# EAGLE board open_bioband_V1.1 (EAGLE 8.0.0)
REV: A
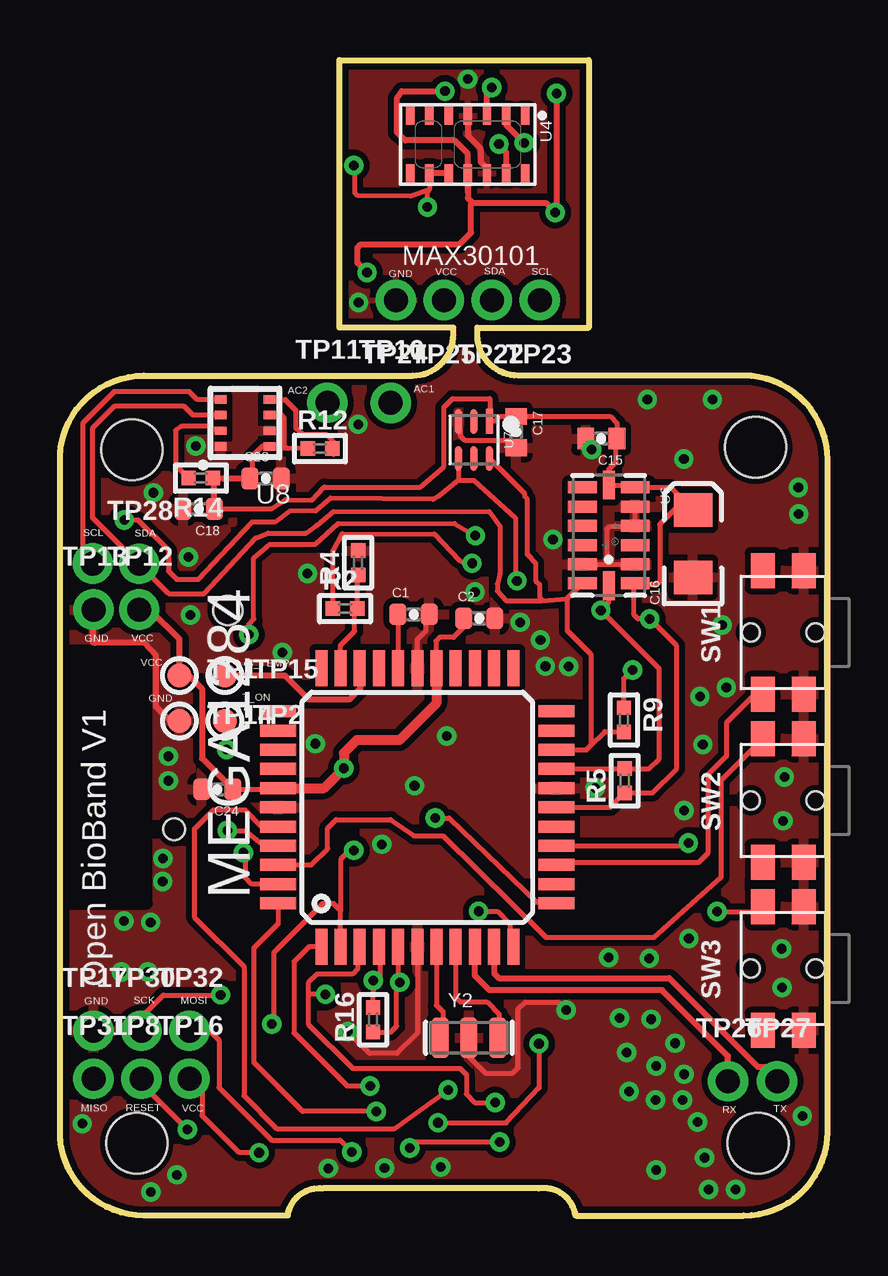
[diagram p0: board, top side]
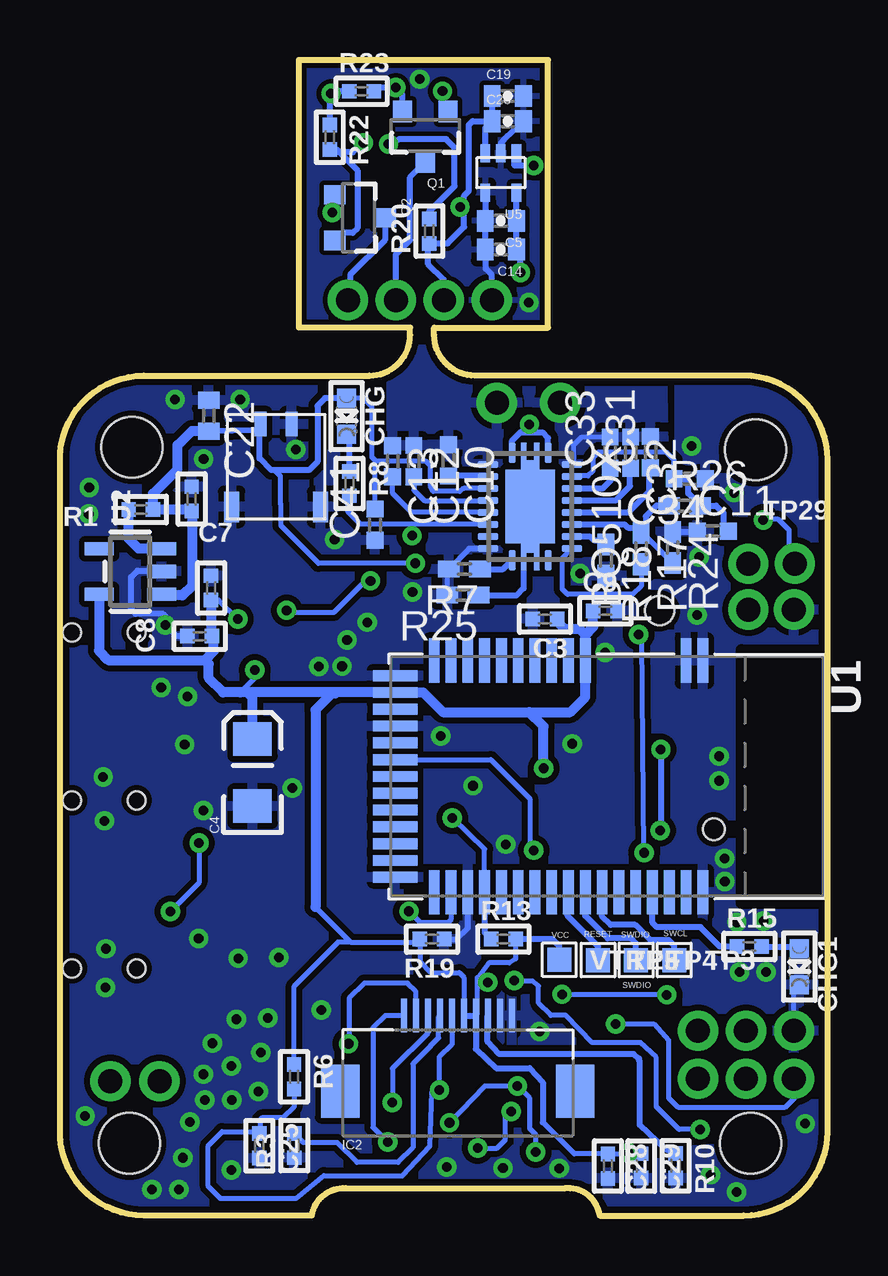
[diagram p1: board, bottom side, seen from below]

Size 32 x 48.15 mm. Coordinates in mm from the lower left corner, seen from the top.
Outline: 21.5,0 28.5,0 arc90 32,3.5 32,31.5 arc90 28.5,35 19.1,35 arc-90 17.4,36.7 17.4,37 22.05,37 22.05,48.15 11.65,48.15 11.65,37 16.4,37 16.4,36.7 arc-90 14.7,35 3.5,35 arc90 0,31.5 0,3.5 arc90 3.5,0 9.5,0 arc-90 10.96,1.13 19.96,1.13 arc-90 21.5,0
Copper layers (1*16): Top 0.035mm / dielectric 1.5mm / Bottom 0.035mm
Design rules "micron20 *": minimum track width 6mil, minimum drill 6mil, track to track 0.2mm, track to pad 0.2mm, pad to pad 0.2mm, via to via 0.2mm, smd to smd 0mil, copper to edge 8mil, drill to drill 8mil, minimum pad ring 10mil, minimum via ring 8mil, stop-mask expansion 4mil, vias tented up to drill 0mil, thermal gap 10mil
Net classes: 1 power: width 0.203 mm
Holes 2.54 mm at 3,31.91 29,32.01 29.1,3.01 3.2,3.01
Holes 1.2 mm at 7,25.21
tRestrict: area -0.2,13 to 3.6,23.5
bRestrict: area -0.2,13 to 3.6,23.6

## Footprints (pad centres in the part's own frame; a part is rotated, then mirrored left to right if it is on the bottom)
R-PQFP-N20 = smd 0.85 x 0.28: 1 -2.235,-0.75; 10 2.235,-0.75; 11 2.235,0.75; 20 -2.235,0.75 | smd 0.28 x 0.85: 2 -1.75,-1.75; 3 -1.25,-1.75; 4 -0.75,-1.75; 5 -0.25,-1.75; 6 0.25,-1.75; 7 0.75,-1.75; 8 1.25,-1.75; 9 1.75,-1.75; 12 1.75,1.75; 13 1.25,1.75; 14 0.75,1.75; 15 0.25,1.75; 16 -0.25,1.75; 17 -0.75,1.75; 18 -1.25,1.75; 19 -1.75,1.75 | smd 3.05 x 2.05: E@1 0,0 | smd 3.85 x 0.5: E@2 0,0 | smd 5.3 x 0.23: E@3 0,0.275; E@4 0,-0.275
0402-CAP = smd 0.7 x 0.9: 1 -0.65,0; 2 0.65,0
_0402 = smd 0.6 x 0.6: 1 -0.508,0; 2 0.508,0
EIA3216 = smd 1.4 x 1.6: A 1.4,0; C -1.4,0
C0402_LIBELIUM = smd 0.7 x 0.7: 1 -0.65,0; 2 0.65,0
C0402 = smd 0.7 x 0.9: 1 -0.65,0; 2 0.65,0
CHIPLED_0603 = smd 0.8 x 0.8: A 0,-0.75; C 0,0.75
FPC_10PIN_52892-1095 = smd 0.25 x 1.4: P$1 -2.25,0; P$2 -1.75,0; P$3 -1.25,0; P$4 -0.75,0; P$5 -0.25,0; P$6 0.25,0; P$7 0.75,0; P$8 1.25,0; P$9 1.75,0; P$10 2.25,0 | smd 1.6 x 2.2: SUPPORT1 -4.9,-3.15; SUPPORT2 4.9,-3.15
TQFP44 = smd 1.5 x 0.5: 1 -5.8,4; 2 -5.8,3.2; 3 -5.8,2.4; 4 -5.8,1.6; 5 -5.8,0.8; 6 -5.8,0; 7 -5.8,-0.8; 8 -5.8,-1.6; 9 -5.8,-2.4; 10 -5.8,-3.2; 11 -5.8,-4; 23 5.8,-4; 24 5.8,-3.2; 25 5.8,-2.4; 26 5.8,-1.6; 27 5.8,-0.8; 28 5.8,0; 29 5.8,0.8; 30 5.8,1.6; 31 5.8,2.4; 32 5.8,3.2; 33 5.8,4 | smd 0.5 x 1.5: 12 -4,-5.8; 13 -3.2,-5.8; 14 -2.4,-5.8; 15 -1.6,-5.8; 16 -0.8,-5.8; 17 0,-5.8; 18 0.8,-5.8; 19 1.6,-5.8; 20 2.4,-5.8; 21 3.2,-5.8; 22 4,-5.8; 34 4,5.8; 35 3.2,5.8; 36 2.4,5.8; 37 1.6,5.8; 38 0.8,5.8; 39 0,5.8; 40 -0.8,5.8; 41 -1.6,5.8; 42 -2.4,5.8; 43 -3.2,5.8; 44 -4,5.8
SOT23-3 = smd 0.8 x 0.9: 1 -0.95,-1; 2 0.95,-1; 3 0,1.1
R0402_LIBELIUM = smd 0.9 x 0.7: 1 -0.65,0; 2 0.65,0
TACT_SMD2 = smd 1.45 x 1: 1 -2.575,-0.5; 2 -2.575,-2.2; 3 2.575,-0.5; 4 2.575,-2.2 | hole 0.75: 0,0; 0,-2.7
TESTPOINT_ROUND_1MM = smd 1 x 1: P$1 0,0
TESTPOINT_PAD_1MM = smd 1 x 1: P$1 0,0
1X01_ROUND = drill 1 pad 1.676: 1 0,0
BLE_MODULE_RAYTAC_MDBT40 = smd 1.85 x 0.45: 1 -4.825,4; 2 -4.825,3.3; 3 -4.825,-0.9; 4 -4.825,-1.6; 5 -4.825,-2.3; 6 -4.825,-3; 7 -4.825,-3.7; 8 -4.825,-4.4; 9 -4.825,-5.1; 10 -4.825,-5.8; 11 -4.825,-6.5; 12 -4.825,-7.2; 26 4.825,-7.2; 27 4.825,-6.5; 28 4.825,-5.8; 29 4.825,-5.1; 30 4.825,-4.4; 31 4.825,-3.7; 32 4.825,-3; 33 4.825,-2.3; 34 4.825,-1.6; 35 4.825,-0.9; 36 4.825,-0.2; 37 4.825,0.5; 38 4.825,1.2; 39 4.825,1.9; 40 4.825,2.6; 41 4.825,3.3; 42 4.825,4 | smd 0.45 x 1.85: 13 -4.2,-8.825; 14 -3.5,-8.825; 15 -2.8,-8.825; 16 -2.1,-8.825; 17 -1.4,-8.825; 18 -0.7,-8.825; 19 0,-8.825; 20 0.7,-8.825; 21 1.4,-8.825; 22 2.1,-8.825; 23 2.8,-8.825; 24 3.5,-8.825; 25 4.2,-8.825 | hole 0.9: 2.2,4.45
SOT23-5 = smd 0.55 x 1.2: 1 -0.95,-1.3; 2 0,-1.3; 3 0.95,-1.3; 4 0.95,1.3; 5 -0.95,1.3
OLGA-14 = smd 0.75 x 0.35: 1 -1.2,2.4; 2 -1.2,1.6; 3 -1.2,0.8; 4 -1.2,0; 5 -1.2,-0.8; 6 -1.2,-1.6; 7 -1.2,-2.4; 8 1.2,-2.4; 9 1.2,-1.6; 10 1.2,-0.8; 11 1.2,0; 12 1.2,0.8; 13 1.2,1.6; 14 1.2,2.4
SC70 = smd 0.4 x 0.75: 1 -0.65,-0.825; 2 0,-0.825; 3 0.65,-0.825; 4 0.65,0.825; 5 -0.65,0.825
LGA14 = smd 0.5 x 1.2: 1 2,1.1; 2 1.2,1.1; 3 0.4,1.1; 4 -0.4,1.1; 5 -1.2,1.1; 6 -2,1.1; 8 -2,-1.1; 9 -1.2,-1.1; 10 -0.4,-1.1; 11 0.4,-1.1; 12 1.2,-1.1; 13 2,-1.1 | smd 1.2 x 0.5: 7 -2.1,0; 14 2.1,0
FN-6 = smd 1.05 x 0.3: 1 -0.775,0.65; 2 -0.775,0; 3 -0.775,-0.65; 4 0.775,-0.65; 5 0.775,0; 6 0.775,0.65
BME280_LGA = smd 0.5 x 0.35: P$1 1.025,0.975; P$2 1.025,0.325; P$3 1.025,-0.325; P$4 1.025,-0.975; P$5 -1.025,-0.975; P$6 -1.025,-0.325; P$7 -1.025,0.325; P$8 -1.025,0.975
DF57H-2P = smd 0.508 x 1.016: P$1 1.4,3.95; P$2 2.7,3.95 | smd 0.635 x 1.27: P$3 0.2,0.5; P$4 3.9,0.5
RESONATOR-SMD = smd 0.7 x 1.7: 1 -1.2,0; 2 0,0; 3 1.2,0

## Placement (x,y rotation side)
BQ510X  BQ24120  [R-PQFP-N20]  12.4,29.55 270 bottom
C1  0.1uF  [0402-CAP]  14.74,25.05 0 top
C2  0.1uF  [0402-CAP]  17.48,24.89 0 top
C3  1uF  [_0402]  11.78,24.86 180 bottom
C4  10uF  [EIA3216]  23.97,18.46 90 bottom
C5  0.1uF  [0402-CAP]  13.62,41.45 180 bottom
C6  10µF  [_0402]  26.51,29.86 90 bottom
C7  1uF  [_0402]  25.7,26.15 90 bottom
C8  10µF  [_0402]  26.18,24.14 180 bottom
C9  1uF  [_0402]  9.26,25.2 0 bottom
C10  0.01uF  [C0402_LIBELIUM]  15.8,31.47 270 bottom
C11  4.7uF  [C0402_LIBELIUM]  4.78,28.52 0 bottom
C12  0.47uF  [C0402_LIBELIUM]  17.25,31.44 270 bottom
C13  0.022uF  [C0402_LIBELIUM]  18.13,31.43 270 bottom
C14  4.7uF  [0402-CAP]  13.62,40.25 180 bottom
C15  0.1uF  [0402-CAP]  22.57,32.38 180 top
C16  10uF  [EIA3216]  26.39,27.99 90 top
C17  0.1uF  [0402-CAP]  19.02,32.65 270 top
C18  0.1uF  [0402-CAP]  5.78,29.45 180 top
C19  10uF  [0402-CAP]  13.33,46.65 0 bottom
C20  0.1uF  [0402-CAP]  13.33,45.6 0 bottom
C22  4.7uF  [C0402]  25.8,33.33 270 bottom
C23  0.1uF  [0402-CAP]  8.57,30.71 0 top
C24  0.1uF  [0402-CAP]  6.56,17.76 180 top
C25  0.1µF  [_0402]  23.69,2.91 270 bottom
C28  1µF  [_0402]  9.15,2.06 270 bottom
C29  1µF  [_0402]  7.76,2.07 270 bottom
C31  0.022uF  [C0402_LIBELIUM]  7.38,31.81 90 bottom
C32  0.47uF  [C0402_LIBELIUM]  8.21,31.79 270 bottom
C33  0.01uF  [C0402_LIBELIUM]  9.06,31.79 90 bottom
C34  0.022uF  [C0402_LIBELIUM]  5.75,30.7 180 bottom
C41  4.7uF  [C0402_LIBELIUM]  18.86,28.79 90 bottom
CHG  ORANGE  [CHIPLED_0603]  20.05,33.31 180 bottom
CHG1  BLUE  [CHIPLED_0603]  1.18,10.37 180 bottom
IC2  LS013B4DN04  [FPC_10PIN_52892-1095]  15.42,8.34 0 bottom
MEGA1284  [TQFP44]  14.9,17.01 90 top
Q1  200mA/50V  [SOT23-3]  16.77,45 180 bottom
Q2  200mA/50V  [SOT23-3]  19.55,41.58 270 bottom
R1  100k  [_0402]  28.63,29.42 180 bottom
R2  100k  [_0402]  11.89,25.29 0 top
R3  10k  [_0402]  22.23,2.92 90 bottom
R4  100K  [_0402]  12.43,27.2 90 top
R5  4.7K  [_0402]  23.54,18.12 90 top
R6  10k  [_0402]  22.24,5.79 270 bottom
R7  2.43K  [R0402_LIBELIUM]  15.14,26.94 180 bottom
R8  1K  [_0402]  19.93,30.5 270 bottom
R9  4.7K  [_0402]  23.51,20.65 270 top
R10  10k  [_0402]  6.33,2.07 270 bottom
R12  4.7K  [_0402]  10.84,31.96 0 top
R13  100K  [_0402]  13.51,11.52 0 bottom
R14  4.7K  [_0402]  5.87,30.73 180 top
R15  1k  [_0402]  3.26,11.21 0 bottom
R16  4.7K  [_0402]  13.05,8.16 90 top
R17  3.83K  [R0402_LIBELIUM]  7.77,27.79 270 bottom
R18  10k  [R0402_LIBELIUM]  9.24,27.31 270 bottom
R19  100K  [_0402]  16.49,11.52 180 bottom
R20  4.7K  [_0402]  16.6,41.02 90 bottom
R22  4.7K  [_0402]  20.75,44.93 270 bottom
R23  4.7K  [_0402]  19.43,46.85 0 bottom
R24  140  [R0402_LIBELIUM]  6.46,27.84 270 bottom
R25  0  [R0402_LIBELIUM]  15.2,25.86 180 bottom
R26  100k  [R0402_LIBELIUM]  5.96,29.58 0 bottom
SW1  [TACT_SMD2]  28.8,24.3 90 top
SW2  [TACT_SMD2]  28.8,17.3 90 top
SW3  [TACT_SMD2]  28.8,10.3 90 top
TP1  [TESTPOINT_ROUND_1MM]  4.98,22.51 0 top
TP2  [TESTPOINT_ROUND_1MM]  6.88,20.61 0 top
TP3  SWCLK  [TESTPOINT_PAD_1MM]  6.39,10.65 0 bottom
TP4  SWDIO  [TESTPOINT_PAD_1MM]  7.98,10.65 0 bottom
TP5  FCTRST  [TESTPOINT_PAD_1MM]  9.57,10.65 0 bottom
TP8  [1X01_ROUND]  3.4,5.7 0 top
TP10  [1X01_ROUND]  13.79,33.86 0 top
TP11  [1X01_ROUND]  11.15,33.87 0 top
TP12  [1X01_ROUND]  3.3,25.25 0 top
TP13  [1X01_ROUND]  1.4,25.25 0 top
TP14  [TESTPOINT_ROUND_1MM]  4.98,20.61 0 top
TP15  [TESTPOINT_ROUND_1MM]  6.88,22.51 0 top
TP16  [1X01_ROUND]  5.4,5.7 0 top
TP17  [1X01_ROUND]  1.4,7.7 0 top
TP22  [1X01_ROUND]  18,38.15 180 top
TP23  [1X01_ROUND]  20,38.15 180 top
TP24  [1X01_ROUND]  14,38.15 180 top
TP25  [1X01_ROUND]  16,38.15 180 top
TP26  [1X01_ROUND]  27.85,5.6 0 top
TP27  [1X01_ROUND]  29.9,5.6 0 top
TP28  [1X01_ROUND]  3.3,27.16 0 top
TP29  [1X01_ROUND]  1.36,27.17 0 bottom
TP30  [1X01_ROUND]  3.4,7.7 0 top
TP31  [1X01_ROUND]  1.4,5.7 0 top
TP32  [1X01_ROUND]  5.4,7.7 0 top
U1  [BLE_MODULE_RAYTAC_MDBT40]  9.2,18.3 270 bottom
U2  AP2112-3.3  [SOT23-5]  29.07,26.84 90 bottom
U4  MAX30101  [OLGA-14]  17,44.63 270 top
U5  1.8V/100mA  [SC70]  13.62,43.45 180 bottom
U6  ADXL345ORIG  [LGA14]  22.88,28.34 270 top
U7  TSL2561FN  [FN-6]  17.26,32.32 270 top
U8  BME280  [BME280_LGA]  7.72,33.03 180 top
U$3  DF57H  [DF57H-2P]  25.04,29.03 0 bottom
VTREF  FCTRST  [TESTPOINT_PAD_1MM]  11.18,10.66 0 bottom
Y2  RESONATORSMD  [RESONATOR-SMD]  17.05,7.41 0 top

## Library data of the parts
BQ510X = texas_2
C1 C2 C4 C18 C23 C24 Y2 = microduino
C3 C6 C7 C9 C25 C28 C29 CHG CHG1 IC2 R1-R6 R8-R10 R12-R16 R19 R20 R22 R23 TP1-TP5 TP14 TP15 U1 U2 VTREF = microbuilder
C5 C14 C17 C19 C20 = SparkFun-Capacitors
C8 = microbuilder; COMPANY: ADAFRUIT INDUSTRIES; DRAWN: KTOWN; REV: A
C10-C13 C31-C34 C41 R7 R17 R18 R24-R26 = libelium
C15 C16 = SparkFun
C22 = rcl
MEGA1284 = atmel; OC_FARNELL: 1455123; OC_NEWARK: 58M3748
Q1 Q2 = SparkFun-DiscreteSemi; PROD_ID: TRANS-00830
SW1-SW3 = zak
TP8 TP10-TP13 TP16 TP17 TP22-TP32 = microbuilder; BOM: EXCLUDE
U4 = SparkFun-Sensors; PROD_ID: IC-13510
U5 = SparkFun-PowerIC; PROD_ID: VREG-08428
U6 = Testing
U7 = mike-temp
U8 = BME280ComponentLibrary; PROD_ID: IC-13090
U$3 = onomo

## Nets
1.8V: C5.1 C14.1 Q1.1 Q2.1 R22.1 R23.1 U4.11 U5.5
5: MEGA1284.41 TP2.P$1
14: MEGA1284.26
15: MEGA1284.25
16(TDI): MEGA1284.24
17(TDO): MEGA1284.23
18(TMS): MEGA1284.22
19(TCK): MEGA1284.21
23: MEGA1284.16
!CS: R14.2 U8.P$2
!INT: R20.2 U4.13
!RESET: MEGA1284.4 R16.2 TP8.1
+3V3: C2.1 C3.1 C4.A C7.1 C8.1 C9.1 C15.1 C16.A C17.1 C18.1 C23.1 C24.1 C28.1 C29.1 IC2.P$6 IC2.P$7 MEGA1284.5 MEGA1284.17 MEGA1284.27 MEGA1284.38 R5.1 R6.1 R9.1 R12.1 R13.2 R14.1 R16.1 R19.2 TP1.P$1 TP12.1 TP16.1 U1.3 U1.14 U2.5 U6.1 U6.6 U6.7 U7.1 U8.P$6 U8.P$8 VTREF.P$1
+3V31: C19.1 C20.1 R20.1 TP25.1 U4.9 U4.10 U5.1 U5.3
A0: MEGA1284.30
A2: MEGA1284.32 R2.2 R4.1
A3: MEGA1284.33
A4: MEGA1284.34
A5: MEGA1284.35
A6: MEGA1284.36
A7: MEGA1284.37
AC1: BQ510X.2 C10.1 C12.1 C13.1 TP10.1
AC2: BQ510X.19 C31.2 C32.1 C33.2 TP11.1
AREF: C1.1 MEGA1284.29
BOOT3: BQ510X.3 C10.2
CHG: BQ510X.7 MEGA1284.43 R8.2
CLMP2: BQ510X.16 C32.2
CONNECTED_LED: R15.1 U1.39
DCC: U1.15
DEC2: U1.41
DFU_3V: U1.24
DISP: C25.1 IC2.P$5 MEGA1284.40 R6.2
EN: R1.2 U2.3
EXTCOMIN: IC2.P$4 R3.2
EXTMODE: IC2.P$8 R10.1
FCTRYRST_3V: TP5.P$1 U1.34
FOD: BQ510X.14 R17.1 R24.2 R26.1
GND: BQ510X.1 BQ510X.9 BQ510X.20 C1.2 C2.2 C3.2 C4.C C6.2 C7.2 C8.2 C9.2 C11.1 C15.2 C16.C C17.2 C18.2 C22.1 C23.2 C24.2 C25.2 C28.2 C29.2 C34.1 C41.1 CHG1.C IC2.P$9 IC2.P$10 MEGA1284.6 MEGA1284.18 MEGA1284.28 MEGA1284.39 R3.1 R4.2 R7.2 R10.2 R18.2 R19.1 R24.1 R25.2 SW1.2 SW1.4 SW2.2 SW2.4 SW3.2 SW3.4 TP13.1 TP14.P$1 TP17.1 U1.1 U1.2 U1.13 U1.16 U1.25 U1.28 U1.42 U2.2 U6.2 U6.4 U6.5 U6.12 U7.3 U8.P$1 U8.P$7 U$3.P$2 U$3.P$3 U$3.P$4 Y2.2
GND1: C5.2 C14.2 C19.2 C20.2 TP24.1 U4.4 U4.12 U5.2 U5.4
LV_SCL: Q2.2 R22.2 U4.2
LV_SDA: Q1.2 R23.2 U4.3
MISO: MEGA1284.2 TP31.1 U1.18
MOSI: IC2.P$2 MEGA1284.1 TP32.1
N$1: CHG.C R8.1
N$2: MEGA1284.7 Y2.1
N$6: CHG1.A R15.2
N$9: MEGA1284.8 Y2.3
N$14: BQ510X.6 C13.2
N$15: BQ510X.5 C12.2
N$19: BQ510X.10 R7.1
N$21: BQ510X.17 C33.1
N$23: BQ510X.18 C11.2 C34.2 R26.2
N$24: BQ510X.15 C31.1
N$25: BQ510X.8
N$26: BQ510X.12 R17.2
N$27: BQ510X.11
N$28: BQ510X.E@1 BQ510X.E@2 BQ510X.E@3 BQ510X.E@4 R25.1
NAV_DOWN: MEGA1284.15 SW3.3
NAV_SEL: MEGA1284.42 SW2.3
NAV_UP: MEGA1284.14 SW1.1
OUT: BQ510X.4 C6.1 C22.2 C41.2 CHG.A R1.1 R2.1 U2.1 U$3.P$1
P0.5: BQ510X.13 R18.1
RTS_O: U1.26
RX: MEGA1284.9 TP26.1
RX1: MEGA1284.11 U1.27
S_TEMP: MEGA1284.31 TP15.P$1
SCL: MEGA1284.19 R5.2 TP29.1 U6.14 U7.4 U8.P$4
SCL1: Q2.3 TP23.1
SCLK: IC2.P$1 MEGA1284.44
SCS: IC2.P$3 MEGA1284.3 TP30.1
SDA: MEGA1284.20 R9.2 TP28.1 U6.13 U7.6 U8.P$3
SDA1: Q1.3 TP22.1
SDO/ADR: R12.2 U8.P$5
SWCLK: TP3.P$1 U1.36
SWDIO/RST_3V: TP4.P$1 U1.35
TX: MEGA1284.10 TP27.1
TX1: MEGA1284.12 R13.1 U1.29

## Tracks (layer width: path | path; a pad name or v marks a point on that pad's centre or on a via)
1.8V  (via drill 0.4)
  Top 0.254: v12.8,39.3 12.4,39.7 12.4,40.33 12.54,40.47 16.65,40.47 17.14,40.96 17.14,42.14 17.2,42.2 | 17,42.65 U4.11 | U4.11 17,42.4 17.2,42.2 | 17.2,42.2 20.25,42.2 v20.65,41.8 20.7,41.85 v20.7,46.75 | U4.11 17,44.25 16.45,44.8 14.4,44.8 14.05,45.15 14.05,46.55 14.25,46.85 v16.05,46.85
  Bottom 0.254: U5.5 C5.1 C14.1 12.8,40.08 v12.8,39.3 | v20.65,41.8 20.65,42.43 Q2.1 | v16.05,46.85 16.05,46.23 Q1.1 | R23.1 20.6,46.85 v20.7,46.75 20.75,46.7 R22.1
5  (via drill 0.4)
  Top 0.2: v6.98,16.04 7.74,16.04 8.43,15.47 9.04,15.47 MEGA1284.41
  Top 0.254: TP2.P$1 6.88,19.49 v6.95,19.42
  Bottom 0.254: v6.95,19.42 6.95,16.07 v6.98,16.04
!CS
  Top 0.2: U8.P$2 6.67,32.72 6.48,32.72 6.25,32.88 5.06,32.88 4.82,32.72 4.82,31.27 R14.2
!INT  (via drill 0.4)
  Top 0.254: v18.3,44.65 18.4,44.55 18.6,44.3 U4.13
  Bottom 0.254: R20.2 16.6,41.85 15.55,42.9 15.55,44.5 15.9,44.85 17.85,44.85 v18.3,44.65
!RESET  (via drill 0.4)
  Top 0.2: MEGA1284.4 13.36,11.14 13.36,9.83 v13.06,9.8 R16.2 12.94,8.67 | TP8.1 3.4,5.5 v5.31,3.59
  Bottom 0.2: v5.31,3.59 6.19,3.59 7.14,4.54 7.14,6.59 7.8,7.21 9.81,7.21 10.9,8.34 11.54,8.34 12.05,8.85 12.05,9.57 12.3,9.77 12.62,9.77 13.05,9.77 v13.06,9.8
+3V3  (via drill 0.4)
  Top 0.2: C2.1 16.83,24.51 16.41,24.09 15.82,24.09 15.67,23.94 15.67,22.83 MEGA1284.27 | MEGA1284.17 22.94,17.01 R5.1 24.7,17.61 25.71,18.62 25.71,23.74 v24.59,24.86 24.1,24.86 23.93,25.03 23.93,26.29 U6.1 24.04,26.28 24.86,26.28 25,26.42 25,28.8 25.59,29.39 C16.A 25.44,30.34 U6.6 23.88,30.44 U6.7 22.88,31.09 23.18,31.39 23.18,32.34 C15.1 23.22,33.02 22.94,33.3 C17.1 18.34,33.3 18.15,33.11 U7.1 | R9.1 23.51,22.37 v23.88,22.74 | C24.1 9.05,17.76 MEGA1284.38 | R12.1 9.51,31.97 | 9.51,31.97 9.13,32.02 U8.P$8 8.42,32.05 8,31.63 8,30.79 C23.1 | U8.P$6 9.25,33.35 9.34,33.26 9.35,31.99 9.51,31.97 | C18.1 8.82,29.45 9.4,29.83 10.5,29.81 11.02,30.35 15.02,30.35 16.01,31.21 16.01,33.68 16.37,34.04 17.91,34.04 17.92,34.03 U7.1 | U7.1 | TP16.1 5.92,5.18 5.92,4.17 7.47,2.62 v8.3,2.62 | MEGA1284.5 14.1,9.72 v14.16,9.72 14.04,9.6 14.04,7.9 13.79,7.65 R16.1
  Top 0.254: TP12.1 3.74,25.25 4.98,24.01 TP1.P$1 5.36,22.52 5.92,21.96 5.92,19.05 C24.1 | C18.1 6.43,30.68 R14.1 7.91,30.73 C23.1
  Top 0.406: MEGA1284.38 11.01,17.81 v11.84,18.64 11.84,19.28 12.37,19.81 14.15,19.81 15.7,21.36 MEGA1284.27
  Bottom 0.2: R13.2 13,10.7 13.27,10.53 14.12,10.53 14.57,9.92 14.61,9.92 14.61,9.62 | 14.61,9.62 14.61,8.39 IC2.P$7 | R19.2 17,10.57 16.55,10.12 15.35,10.12 15.16,9.93 IC2.P$6 | 12.44,20.98 16.06,20.98 16.87,21.79 20.5,21.79 20.53,21.76 | 19.89,11.39 20.41,11.39 22.24,9.56 R6.1 | v23.88,22.74 23.88,22.39 24.47,21.8 | C7.1 25.38,25.65 v24.59,24.86 | 21.35,12.85 19.89,11.39 | 19.89,11.39 17.13,11.39 | v14.16,9.72 14.56,9.67 14.61,9.62 | C29.1 8.34,2.58 | 8.34,2.58 C28.1 10.56,2.57 11.87,3.88 | 8.34,2.58 v8.3,2.62
  Bottom 0.254: IC2.P$6 IC2.P$7 14.67,6.94 13.82,6.14 12.41,6.14 11.87,5.55 11.87,3.88 | VTREF.P$1 11.18,11.23 11.46,11.51 R13.2 | 9.77,25.18 C9.1
  Bottom 0.406: 12.44,20.98 16.04,20.98 16.86,21.8 U1.14 24.2,21.8 | 12.44,20.98 10.72,20.98 10.1,21.6 U1.3 10.1,24.21 | 10.1,24.21 9.78,24.53 9.78,25.17 C9.1 | C3.1 11.24,24.73 10.97,24.46 10.35,24.46 10.1,24.21 | C7.1 25.7,24.17 C8.1 25.59,24.06 25.59,23.53 25.97,23.15 | U2.5 30.37,23.54 29.98,23.15 25.97,23.15 | 24.2,21.8 24.47,21.8 25.2,21.8 25.8,22.4 25.8,22.98 25.97,23.15 | 20.53,21.76 20.66,21.76 21.35,21.07 21.35,12.85 | 17.13,11.39 R19.2 | v11.84,18.64 11.84,20.38 12.44,20.98 | C4.A 23.97,21.57 24.2,21.8
+3V31  (via drill 0.4)
  Top 0.2: U4.9 15.4,42.75 | 15.4,42.75 14.62,42.48 12.41,42.5 12.3,42.61 12.3,43.7 v12.25,43.75 | v15.32,42.03 15.32,42.67 15.4,42.75
  Top 0.254: U4.10 U4.9
  Bottom 0.2: 15.15,42.5 15.15,42.2 v15.32,42.03
  Bottom 0.254: TP25.1 16,39 16.65,39.65 16.65,40.46 R20.1 15.84,40.51 15.15,41.2 15.15,42.5 14.95,42.7 14.95,45.45 14.8,45.6 C20.1 | C19.1 C20.1 | U5.3 14.27,45.31 C20.1 | U5.1 13.05,44.2 13.05,43.75 v12.25,43.75
A2
  Top 0.2: MEGA1284.32 11.7,23.76 12.29,24.35 12.29,25.18 R2.2 12.4,26.66 R4.1
AC1
  pour Bottom (isolate 0.254): 13.55,31.12 15.05,31.12 15.05,31.42 18.15,31.42 18.2,36.1 13.1,36.1 12.85,32.62 13.55,32.62
AC2
  Bottom 0.2: C33.2 10.26,32.44 10.6,32.1 10.6,31.35 BQ510X.19
  pour Bottom (isolate 0.305): 11.25,31.12 11.25,32.62 12.55,32.62 12.6,36.1 6.9,35.9 6.85,31.82 9.95,31.82 9.95,31.12
AREF
  Top 0.2: C1.1 MEGA1284.29
BOOT3
  Bottom 0.254: BQ510X.3 14.17,30.82 C10.2
CHG  (via drill 0.4)
  Top 0.2: MEGA1284.43 7.99,13.81 7.73,14.07 7.73,15.13 v7.65,15.12 | v17.32,28.33 16.45,28.83 11.6,28.84 10.63,27.97 8.74,27.97 8.08,27.41 8.08,24.85 7.88,24.65 v7.88,24.21
  Bottom 0.2: BQ510X.7 17.43,28.81 | 17.43,28.81 19.47,28.81 19.99,29.33 19.99,29.93 | v7.65,15.12 7.75,24.08 v7.88,24.21 | v17.32,28.33 17.32,28.8 17.43,28.81
  Bottom 0.254: BQ510X.7 | 19.99,29.93 R8.2
CLMP2
  Bottom 0.254: BQ510X.16 8.83,29.8 8.23,30.4 8.23,31.12 C32.2
CONNECTED_LED
  Bottom 0.254: R15.1 4.49,11.21 5.3,12.02 7.12,12.02 7.3,12.2 U1.39
DISP  (via drill 0.4)
  Top 0.2: v16.18,5.23 13.95,3.62 9.04,3.62 7.67,4.99 7.67,10.37 5.6,12.44 5.6,16.1 6.39,16.89 7.73,16.89 8.41,16.21 MEGA1284.40
  Bottom 0.2: R6.2 22.25,4.53 22.7,4.07 23.58,4.07 23.65,4 23.65,3.45 C25.1 23.69,3.5 25.24,3.5 25.82,2.92 25.82,1.22 25.31,0.71 22.16,0.71 20.99,1.67 17.72,1.66 16.58,2.9 16.5,5.16 v16.18,5.23 16.18,6.61 15.67,7.12 IC2.P$5
EN
  Bottom 0.406: U2.3 28.72,27.79 29.14,28.21 R1.2
EXTCOMIN
  Bottom 0.2: IC2.P$4 16.21,8.29 16.21,7.41 16.55,7.07 16.55,7.06 17.29,6.32 17.29,2.83 17.9,2.22 19.62,2.22 20.44,3.04 21.85,3.04 R3.2
EXTMODE
  Bottom 0.254: IC2.P$8 14.17,7.24 13.69,6.73 8.08,6.73 7.86,6.54 7.86,6.53 7.83,6.41 7.83,3.78 6.71,2.75 R10.1
FCTRYRST_3V
  Bottom 0.254: TP5.P$1 9.57,11.22 10.84,12.49 10.84,13.44 U1.34
FOD
  Bottom 0.2: R24.2 7.7,28.44 R17.1
  Bottom 0.254: R26.1 7.13,29.58 7.58,29.13 7.58,28.63 R17.1 8,28.67 8.33,28.67 8.46,28.8 BQ510X.14
GND  (via drill 0.4)
  Top 0.2: Y2.2 17.05,6.62 17.74,5.93 18.86,5.93 19.1,6.17 19.1,8.61 19.39,8.9 20.77,8.9 v21.1,8.57 | U7.3 16.71,32.47 16.87,32.31 18.74,32.3 C17.2 | MEGA1284.28 14.9,24.01 15.25,24.36 15.25,24.91 C1.2 | U6.12 22.7,27.14 | 22.7,27.14 U6.2 | MEGA1284.6 14.9,7.6 14.06,6.76 12.91,6.76 v12,7.67 | v22.16,31.92 22.3,32 C15.2 | U6.5 23.98,28.88 23.8,28.7 22.9,28.7 22.8,28.6 22.8,27.24 22.7,27.14
  Top 0.254: 1.4,24.81 TP13.1 1.38,25.23 1.38,23.88 1.45,23.86 3.52,23.86 4,23.33 4,21.2 4.59,20.61 TP14.P$1
  Bottom 0.2: TP17.1 1.4,9.4 CHG1.C | R25.2 15.85,26.88 R7.2
  Bottom 0.254: R19.1 15.46,11.52 15,11.98 U1.28 | BQ510X.1 13.15,32.29 12.8,32.64 12.41,32.64 12.41,32.95 v12.43,32.97 12.4,32.94 12.4,32.65 12.38,32.63 11.88,32.63 11.65,32.4 BQ510X.20 | R7.2 14.93,27.8 BQ510X.9 | C8.2 27.13,24.14 v27.6,24.61 | v27.61,24.61 27.61,24.98 27.7,25.07 28.85,25.07 29.04,25.26 29.04,26.6 28.77,26.87 27.8,26.87 U2.2 | R24.1 5.46,28.49 C11.1
  other vias: 19.19,24.72 10.32,26.75 30.78,30.34 27.2,34.01 24.49,34.01 26.01,31.52 30.8,29.24 13.42,15.47 16.13,19.99 14.78,17.91 24.86,1.9 22.31,17.82 20.55,28.17 4.52,19.14 10.64,19.66 5.67,32.07 3.9,30.12 9.27,23.46 4.29,14.88 5.35,27.44 4.52,18.12 2.67,12.27 3.78,12.22 4.28,13.92 2.56,10.15 3.66,10.15 17.3,25.99 26.02,16.88 26.8,19.63 27.78,22.01 22.87,10.75 24.57,10.72 26.22,11.55 4.87,1.7 0.93,3.83 13.53,1.99 5.44,25.03 20.03,23.99 20.24,22.89 21.21,22.88 26.68,21.63 30.2,18.27 30.15,16.45 30.08,11.12 30.1,9.5 30.95,4.15 27.04,1.09 26.87,2.41 26.59,3.9 24.83,4.82 23.73,5.17 23.63,6.79 23.33,8.23 24.65,8.18 25.64,7.18 26.02,5.89 24.85,6.24 28.17,1.09 25.96,4.82 15.87,2.02 11.19,1.97 3.79,0.98
  pour Top (isolate 0.254): -0.8,-0.9 32.7,-0.9 32.7,35.9 18.3,35.9 9,36 -0.8,36
  pour Bottom (isolate 0.254): -0.5,-0.6 32.3,-0.6 32.3,35.6 18.6,35.6 18.55,33.92 18.55,30.82 6.15,30.82 6.2,35.6 -0.5,35.6
GND1  (via drill 0.4)
  Top 0.254: U4.4 17,45 17.55,44.45 17.55,43.9 17.8,43.65 U4.12
  Bottom 0.254: TP24.1 14,39.2 14.25,39.45 14.25,40.23 C14.2 C5.2 U5.4 | C20.2 13.5,44.82 13.62,44.68
  other vias: 17,47.35 12.45,38.05
  pour Top (isolate 0.254): 11.8,36.9 21.8,36.9 21.8,48 11.8,48
  pour Bottom: 12,37 21.65,37 21.6,47.8 11.95,47.8
LV_SCL  (via drill 0.4)
  Top 0.254: U4.2 18.6,45.45 v19.35,44.7
  Bottom 0.254: v19.35,44.7 19.4,44.7 19.8,44.3 20.63,44.3 R22.2 20.47,44.42 19.6,43.55 19.6,41.15 19.8,40.95 20.23,40.95 Q2.2
LV_SDA  (via drill 0.4)
  Top 0.254: U4.3 17.8,46.8 v18,47
  Bottom 0.254: R23.2 18.77,47 v18,47 17.72,46.72 Q1.2
MISO  (via drill 0.4)
  Top 0.2: v12.25,15.22 12.08,15.22 11.7,14.84 11.7,12.71 | MEGA1284.2 11.7,12.71 | 11.7,12.71 11.41,13 10.95,13 8.91,10.96 8.91,7.99 v8.84,7.99
  Bottom 0.2: U1.18 14.04,19 12.41,17.37 12.41,15.38 v12.25,15.22 | TP31.1 1.27,5.57 1.27,5.02 1.77,4.52 6.24,4.52 6.62,4.9 6.62,7.29 7.25,7.99 v8.84,7.99
MOSI  (via drill 0.4)
  Top 0.2: v12.93,5.4 v12.92,5.41 11.96,5.41 9.76,7.61 9.76,10.58 10.39,11.21 MEGA1284.1 | v15.76,3.87 18.6,3.86 19.97,5.32 v19.97,7.16 | TP32.1 6.24,7.7 6.63,7.31 6.63,5.33 8.82,3.14 11.67,3.14 v12.16,2.65 12.14,2.63
  Bottom 0.2: v15.76,3.87 14.3,5.4 v12.93,5.4 12.41,4.88 12.41,3.62 12.16,3.37 v12.16,2.65 | IC2.P$2 17.18,8.35 17.18,9.36 17.51,9.69 19.31,9.69 19.94,9.06 19.94,7.19 v19.97,7.16
N$1
  Bottom 0.254: R8.1 19.93,32.44 CHG.C
N$2
  Top 0.2: MEGA1284.7 15.7,8.76 15.97,8.49 15.97,7.53 Y2.1
N$6
  Bottom 0.254: R15.2 1.27,11.21 CHG1.A
N$9
  Top 0.2: MEGA1284.8 16.5,9.1 16.69,8.91 17.8,8.91 18.31,8.4 18.31,7.47 Y2.3
N$14
  Bottom 0.2: BQ510X.6 17.34,29.3 18.13,30.09 C13.2
N$15
  Bottom 0.2: C12.2 17.25,30.23 16.81,29.79 BQ510X.5
N$19
  Bottom 0.254: R7.1 13.53,26.94 BQ510X.10
N$21
  Bottom 0.254: BQ510X.17 9.37,30.3 9.05,30.62 C33.1
N$23
  Bottom 0.2: BQ510X.18 10.63,30.82 9.98,30.82 9.79,31.01 9.79,31.57 9.58,31.8 6.71,31.8 6.4,31.49 C34.2
  Bottom 0.254: C11.2 4.34,28.73 4.34,29.27 4.65,29.58 R26.2 5.81,30.09 5.81,30.51 6,30.7 C34.2
N$24
  Bottom 0.254: BQ510X.15 8.31,29.3 7.42,30.19 7.42,31.12 C31.1
N$26
  Bottom 0.2: R17.2 7.77,26.23 8.12,25.88 10.84,25.88 11.06,26.1 11.06,27.39 BQ510X.12
N$28
  Bottom 0.254: BQ510X.E@4 12.67,27.79 12.67,26.13 12.97,25.83 14.52,25.83 R25.1 | BQ510X.E@4 | BQ510X.E@4 BQ510X.E@2 | BQ510X.E@3 | BQ510X.E@3 BQ510X.E@2 | BQ510X.E@2
NAV_DOWN  (via drill 0.4)
  Top 0.2: MEGA1284.15 26.09,15.41 v26.2,15.52 | v27.4,12.67 29.1,12.67 SW3.3
  Bottom 0.2: v26.2,15.52 26.2,13.87 v27.4,12.67
NAV_SEL
  Top 0.2: MEGA1284.42 10.48,14.61 11.16,15.29 11.16,16.15 11.51,16.5 13.79,16.5 14.76,15.82 15.97,15.82 20.27,11.59 24.77,11.59 27.57,14.11 27.57,18.14 SW2.3
NAV_UP
  Top 0.2: SW1.1 28.98,21.72 27.79,20.54 27.79,19.15 27,18.36 27,15.09 26.62,14.71 20.8,14.71 MEGA1284.14
OUT  (via drill 0.4)
  Top 0.2: R2.1 11.38,27.71 11.77,28.42 15.61,28.39 16.64,27.31 16.85,27.21 v17.18,27.18
  Bottom 0.2: BQ510X.4 15.17,30.3 15.33,30.18 16.44,30.18 16.55,30.42 16.55,31.25 16.73,31.43 18.83,31.43 | 18.83,31.43 19,31.6 19,33.71 19.35,34.06 CHG.A | C41.2 18.86,31.4 18.83,31.43 | 23.06,31.06 22.81,30.81 22.81,29.66 22.79,29.64 22.79,28.75 21.22,27.18 v17.18,27.18
  Bottom 0.254: CHG.A 20.95,34.06 21.27,33.74 21.27,31.41 21.62,31.06 23.06,31.06 23.19,31.06 23.68,31.55 23.68,32.94 U$3.P$1 23.74,32.71 C22.2
  Bottom 0.406: R1.1 28.12,30.08 27.1,31.1 27.1,32.1 26.5,32.7 25.82,32.7 C22.2 | R1.1 26.58,29.42 C6.1 | R1.1 26.62,29.42 26.5,29.3 26.5,26.24 26.9,25.84 27.72,25.84 U2.1
P0.5
  Bottom 0.254: BQ510X.13 9.91,28.3 9.75,28.14 9.42,28.14 R18.1
RX
  Top 0.254: TP26.1 27.85,6.65 25.1,9.4 17.9,9.4 17.3,10 MEGA1284.9
RX1  (via drill 0.4)
  Top 0.2: v17.45,12.68 18.23,12.68 18.77,12.14 18.77,11.34 MEGA1284.11
  Bottom 0.2: U1.27 15.7,12.32 15.82,12.2 16.97,12.2 v17.45,12.68
S_TEMP
  Top 0.254: TP15.P$1 9.37,22.51 10.37,21.51 12.07,21.51 12.53,21.97 12.53,22.77 MEGA1284.31
SCL  (via drill 0.4)
  Top 0.2: R5.2 23.52,18.61 MEGA1284.19 24.55,18.61 24.98,19.04 24.98,22.79 v22.55,25.22 22.88,25.55 U6.14 | U8.P$4 5.72,34 5.39,34.33 2.26,34.33 0.95,33.02 0.95,27.58 TP29.1 | U7.4 16.61,30.64 | 16.61,30.64 15.82,29.99 15.81,29.99 15.57,29.84 11.28,29.89 10.67,29.36 9.58,29.35 8.96,28.9 7.99,28.9 5.77,26.51 4.87,26.51 4.53,26.85 4.53,27.72 3.27,28.98 v2.68,28.98 | 16.61,30.64 17.25,30.64 18.98,29.07 18.98,26.42 v19.05,26.45
  Bottom 0.2: TP29.1 1.6,27.41 1.6,28.56 2.05,29.01 2.65,29.01 v2.68,28.98 | v22.55,25.22 22.45,25.12 20.59,25.12 19.4,26.31 v19.05,26.45
SCL1
  Bottom 0.254: Q2.3 18.45,40.65 19.9,39.2 19.9,38.25 TP23.1
SCLK  (via drill 0.4)
  Top 0.2: v18.33,3.06 14.84,3.06 v14.59,2.81 | v13.19,4.34 10.12,4.34 8.08,6.38 8.08,11.14 9.1,12.16 MEGA1284.44
  Bottom 0.2: IC2.P$1 18.43,8.34 18.95,7.82 18.95,3.68 v18.33,3.06 | v14.59,2.81 13.78,2.81 13.43,3.16 13.43,4.1 v13.19,4.34
SCS  (via drill 0.4)
  Top 0.2: MEGA1284.3 12.54,11.17 12.41,11.04 12.41,10.28 12.19,10.06 10.71,10.06 10.35,9.7 10.35,9.25 | 10.35,9.25 10.35,7.98 12.2,6.13 16.68,6.13 16.94,5.87 16.94,5.06 17.29,4.71 v18.14,4.71 | TP30.1 3.4,8.28 4.31,9.19 v6.69,9.19 v6.7,9.2 | v11.07,9.22 10.38,9.22 10.35,9.25
  Bottom 0.2: IC2.P$3 16.67,7.6 18.14,6.13 v18.14,4.71 | v6.7,9.2 11.05,9.2 v11.07,9.22
SDA
  Top 0.2: MEGA1284.20 21.95,19.41 22.13,19.59 | 22.13,19.59 22.71,20.17 23.48,20.17 R9.2 | U8.P$3 5.55,33.35 5.18,33.72 2.27,33.72 1.35,32.8 1.35,29.09 3.18,27.26 3.2,27.26 TP28.1 4.54,25.92 6.03,25.92 6.03,25.94 8.15,28.23 8.67,28.44 10.26,28.44 10.71,28.77 11.4,29.34 17.9,29.33 18.35,28.72 18.34,26.74 18.23,26.32 18.23,26.02 18.59,25.62 20.12,25.62 | 21.14,25.7 U6.13 | U7.6 19.38,30.07 19.38,29.96 19.48,29.86 19.48,27.56 | 19.65,27.39 19.48,27.56 | 20.12,25.62 21.14,25.7 | 19.48,27.56 19.48,27.54 19.83,27.19 19.83,26.46 19.99,26.3 19.99,25.79 20.12,25.62 | 21.14,25.7 21.14,24.38 22.13,23.39 22.13,19.59
SDA1
  Bottom 0.254: TP22.1 18,40.05 17.4,40.65 17.4,43.27 Q1.3
SDO/ADR
  Top 0.2: U8.P$5 9.39,34 9.83,33.56 9.83,32.82 10.13,32.55 11.11,32.55 11.4,32.23 11.4,31.71 R12.2
SWCLK
  Bottom 0.254: TP3.P$1 6.39,11.25 6.62,11.48 7.39,11.48 8.02,12.11 9.04,12.11 9.4,12.47 U1.36
SWDIO/RST_3V
  Bottom 0.254: TP4.P$1 7.98,11.33 8.2,11.55 9.16,11.55 10.1,12.49 U1.35
TX
  Top 0.254: MEGA1284.10 18.1,10.1 18.3,9.9 25.4,9.9 29.1,6.2 29.9,6.2 TP27.1
TX1  (via drill 0.4)
  Top 0.2: v15.64,16.56 16.23,16.56 19.89,13.06 20.65,13.06 MEGA1284.12
  Bottom 0.2: U1.29 14.3,15.27 v15.64,16.56
  Bottom 0.254: U1.29 14.3,11.8 R13.1

## Text on the board
tPlace: MAX30101 | GND | VCC | SDA | SCL | AC2 | AC1 | SCL | SDA | GND | VCC | VCC | S_TEMP | T_ON | GND | Open BioBand V1 | GND | SCK | MOSI | MISO | RESET | VCC | RX | TX
bPlace: SWCL | SWDIO | RESET | VCC | SWDIO